# Altium PCB PCB1.PcbDoc
Units mm, origin at the board's own origin, x right, y up, seen from the top; angles counter-clockwise.
Board outline 182.88 x 101.22 mm, 2 copper layers (Top Layer, Bottom Layer); 26 components, 15 nets, 65 pads, 0 vias.
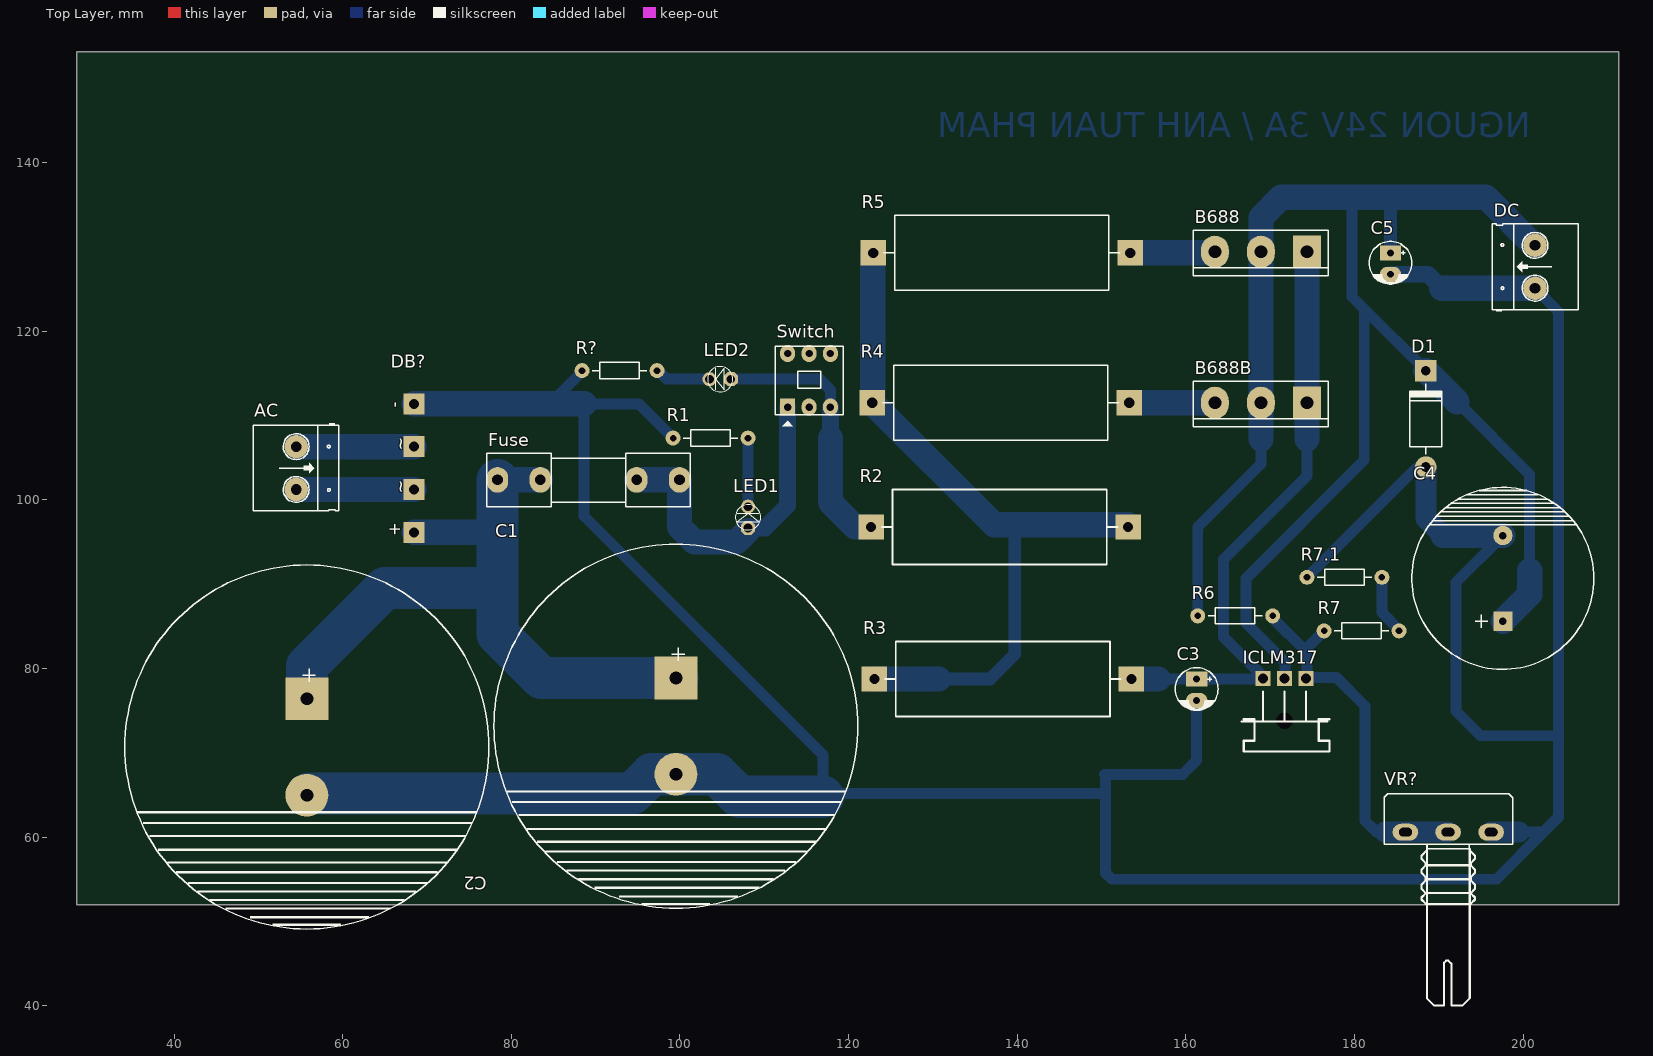
[diagram p0: Top Layer view]
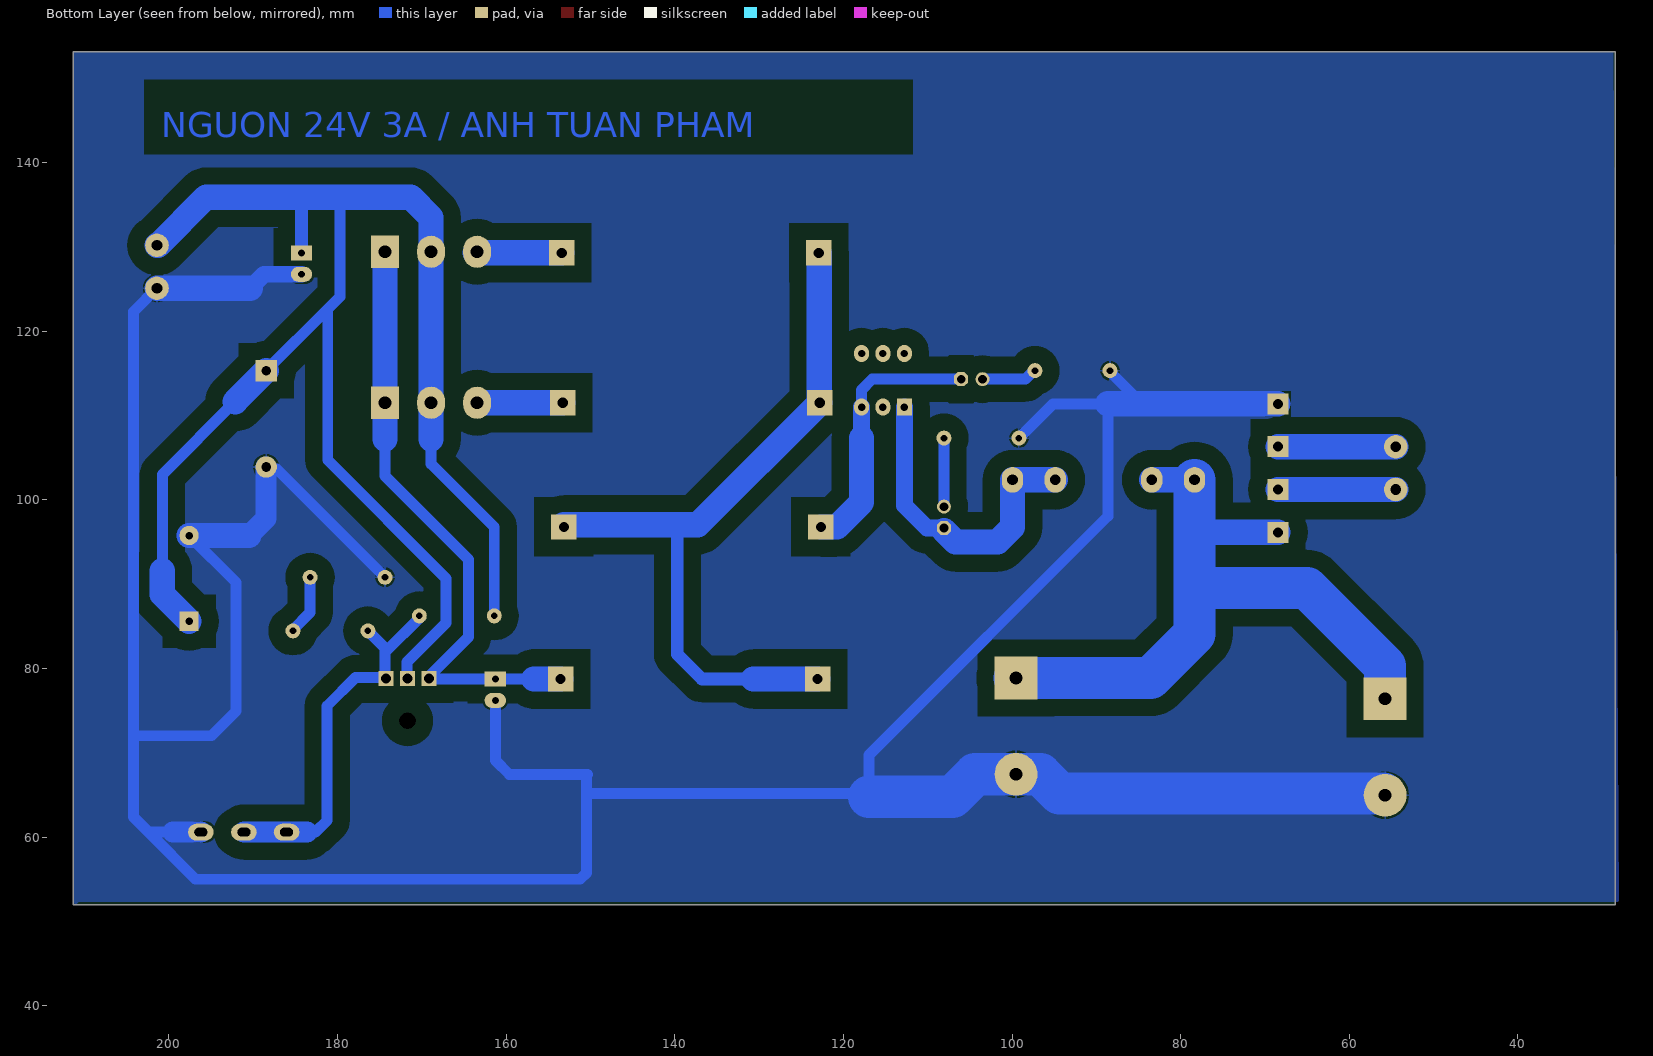
[diagram p1: Bottom Layer view, seen from below]
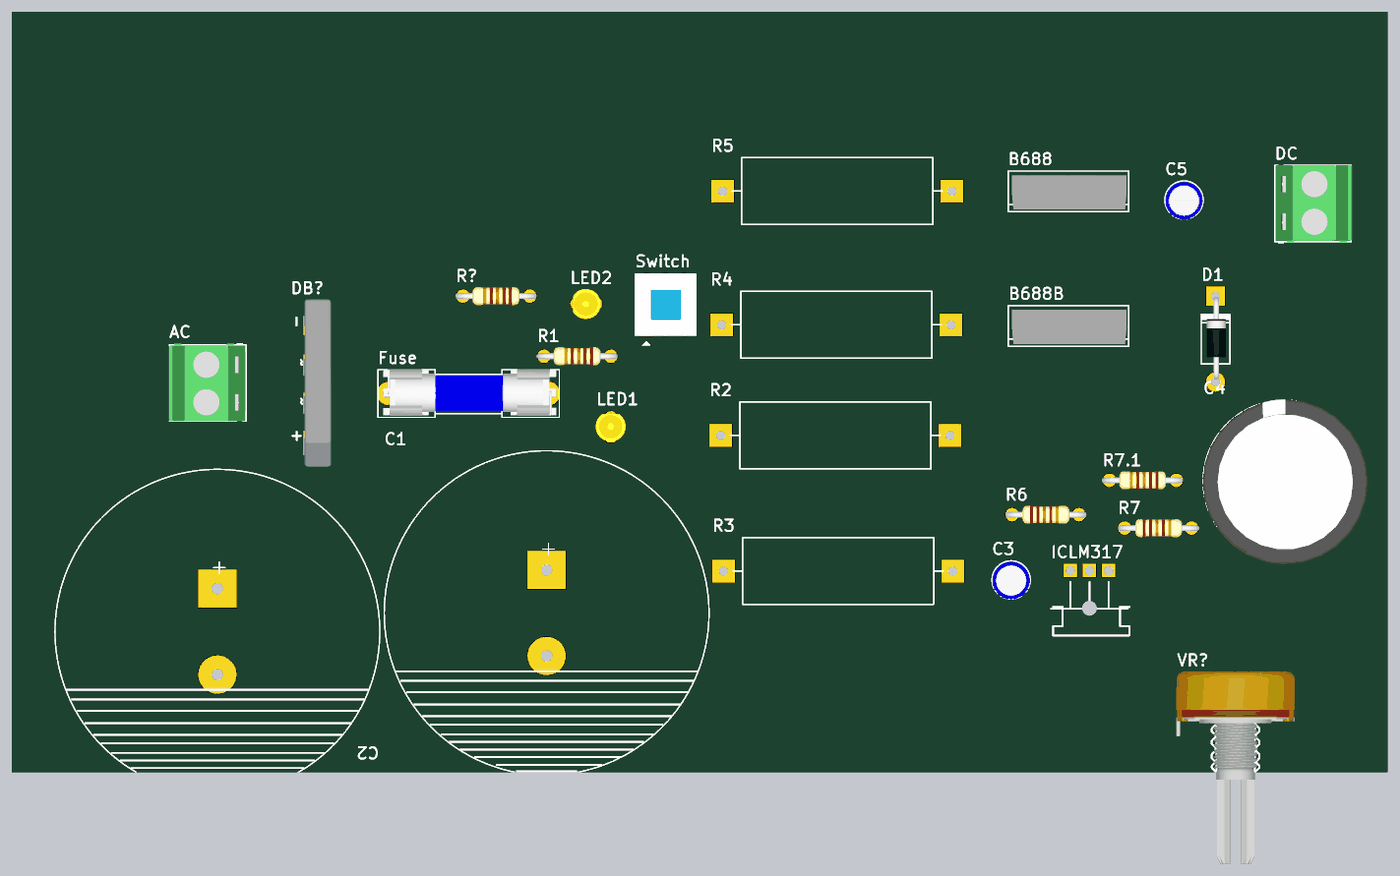
[diagram p2: 3D render of the assembled board from above, using the file's embedded part models]

## Layer stack, top to bottom
Top Solder: solder mask 0.0102, Solder Resist, Dk 3.5
Top Layer: signal copper 0.0356
Dielectric 1: dielectric 0.32, FR-4, Dk 4.8
Bottom Layer: signal copper 0.0356
Bottom Solder: solder mask 0.0102, Solder Resist, Dk 3.5

## Board outline
28.448,51.943 211.328,51.943 211.328,153.162 28.448,153.162

## Design rules (kind name [scope] priority, off if disabled: settings)
Clearance [All] p1: gap=2 ignorepadtopadclearanceinfootprint=FALSE except(0.5: Arc-Arc Arc-Track Arc-SMDPad Arc-THPad Arc-Via Arc-Text Arc-Hole Track-Track Track-SMDPad Track-THPad Track-Via Track-Text Track-Hole SMDPad-SMDPad SMDPad-THPad SMDPad-Via SMDPad-Text SMDPad-Hole THPad-THPad THPad-Via THPad-Text THPad-Hole Via-Via Via-Text Via-Hole Fill-Hole Poly-Hole Region-Hole Text-Text Text-Hole)
PolygonConnect [All] p1: connectstyle=Relief reliefconductorwidth=0.254 reliefentries=4 polygonreliefangle="90 Angle" airgapwidth=0.254
RoutingLayers [All] p1: top layer_v5=FALSE bottom layer_v5=TRUE
RoutingVias [All] p1: holewidth=0.711 width=1.27 viastyle="Through Hole" minholewidth=0.711 minwidth=1.27 maxholewidth=0.711 maxwidth=1.27
SolderMaskExpansion [All] p1: expansion=0.102 istentingtop=FALSE
Width [All] p1: maxlimit=5 minlimit=1 preferedwidth=1.3
29 further rules are at their usual default settings.

## Components (designator, comment, footprint, x,y, rotation, side; value= is the part's Value field where it differs from the comment)
AC "Header 2_1" HED2 54.483,106.299 r270 top value="Header 2"
B688 "B688" QTO-247 174.371,129.413 r180 top
B688B "B688" QTO-247 174.371,111.506 r180 top
C1 "10000uF/50V" CP4.5/19 99.528,78.867 r270 top value=220uF/450V
C2 "10000uF/50V" CP4.5/19 55.753,76.391 r270 top value=220uF/450V
C3 "0.1uF" CP1/2 161.29,78.74 r270 top value=10uF/50V
C4 "4700uF/50V" CP4/8.5 197.612,85.598 r90 top
C5 "0.1uF" CP1/2 184.277,129.286 r270 top value=10uF/50V
D1 "1N4007" D2A 188.468,115.316 r270 top
DB? "KBU1008" "DIODE BRIDGE(FLAT) BIG" 69.113,103.759 r90 top
DC "Header 2_1" HED2 201.422,125.095 r90 top value="Header 2"
Fuse "F5A" Fuse 89.154,102.362 r0 top value=Fuse
ICLM317 "LM317" TO-220 174.244,78.787 r180 top
LED1 "LED" LED-3MM-YELLOW 108.077,96.647 r90 top value="LED 3 ly Single Colour"
LED2 "LED" LED-3MM-YELLOW 106.045,114.3 r180 top value="LED 3 ly Single Colour"
R1 "Res1" R1/4W 99.187,107.315 r0 top value=2.2k
R2 "0.22" "DIEN TRO 5W" 122.682,96.774 r0 top
R3 "22" "DIEN TRO 5W" 123.063,78.74 r0 top
R4 "0.1" "DIEN TRO 5W" 122.809,111.506 r0 top
R5 "0.1" "DIEN TRO 5W" 122.936,129.286 r0 top
R6 "Res1" R1/4W 170.307,86.233 r180 top value=200
R7 "Res1" R1/4W 185.293,84.455 r180 top value=10k
R7.1 "Res1" R1/4W 174.371,90.805 r0 top value=5.1k
R? "Res1" R1/4W 88.392,115.316 r0 top value=2.2k
Switch "SW6S" SW6 112.776,110.998 r90 top value=SW6
VR? "5K" VR-S1 191.135,60.579 r0 top value="Volume 50k"

## Footprints (in the part's own frame and the unit in brackets; to place one, negate y for a bottom-side part, rotate by r counter-clockwise, add the part's x,y. Pads: shape width x height; smd on the part's side, far side on the other; paste and mask are expansions set on the pad)
CP1/2 [mil] "Tu hoa < 22uF/16>50V"
  rect 70x100 hole 32: 1(0,0)
  oval 70x100 hole 32: 2(100,0)
  silkscreen extent -53,-100 146,100, body extent -49,-99 149,99, height 287
CP4.5/19 [mil] "Tu hoa 10,000uF/63V"
  rect 200x200 hole 60: 1(0,0)
  round 200 hole 60: 2(450,0)
  silkscreen extent -625,-850 1075,850
CP4/8.5 [mil] "Tu hoa 4700uF/50V"
  rect 90x90 hole 35: 1(0,0)
  round 90 hole 35: 2(400,0)
  silkscreen extent -225,-425 625,425, body extent -236,-438 630,428, height 984
D2A [mil] "Diode 2A, W 150mil, L 450mil"
  round 100 hole 45: 1(450,0)
  rect 100x100 hole 45: 2(0,0)
  silkscreen extent 61,-75 391,75, body extent 5,-47 435,54, height 100
"DIEN TRO 5W" [mm]
  rect 3x3 hole 1.2: 1(0,0) 2(30.48,0)
  silkscreen extent 1.27,-4.44 29.21,4.44, body extent 2.54,-4.44 27.94,4.44, height 7.62
"DIODE BRIDGE(FLAT) BIG" [mm]
  rect 2.5x2.5 hole 1.2: 1(-7.62,0.66) 2(-2.54,0.66) 3(2.54,0.66) 4(7.62,0.66)
  body extent -11.15,-1.78 11.15,1.98, height 24.27
Fuse [mil] "De Fuse"
  oval 100x120 hole 50: 1(-425,0) 1(-225,0) 2(225,0) 2(425,0)
  silkscreen extent -475,-125 475,125, body extent -448,-117 459,127, height 378
HED2 [mil] "Header 2, 2 pin, hight 300mil, Pin to Pin 200, Colour Green"
  round 110 hole 50: 1(0,0) 2(200,0)
  silkscreen extent -106,-201 300,200, body extent -106,-205 300,197, height 560
LED-3MM-YELLOW [mil]
  oct 65x65 hole 40: 1(0,0)
  round 65 hole 40: 2(100,0)
  silkscreen extent -9,-59 109,59, body extent -27,-77 117,80, height 181
QTO-247 [mil] "TO-247"
  rect 130x150 hole 60: 1(0,0)
  oval 130x150 hole 60: 2(215,0) 3(430,0)
  silkscreen extent -100,-100 530,113, body extent -89,-78 511,102, height 941
R1/4W [mil] "R 1/4W, 2 Pin, 350mil"
  round 70 hole 31: 1(0,0) 2(350,0)
  silkscreen extent 48,-38 302,38, body extent -40,-47 386,47, height 111
SW6 [mil] "SW DTDP - 6Pin 260x300x300 mil"
  rect 80x70 hole 35: 1(0,0)
  oval 80x70 hole 35: 2(0,-100) 3(0,-200) 4(250,-200) 5(250,-100) 6(250,0)
  silkscreen extent -90,-260 285,58, body extent -33,-259 281,55, height 532
TO-220 [mil]
  round 70 hole 78.74 unplated: 0(100,196.85)
  rect 70x70 hole 47.24 unplated: 1(0,0) 2(100,0) 3(200,0)
  silkscreen extent -110,60 300,340
VR-S1 [mil]
  oval 120x78.74 hole 40 slot 60 at 0 deg: 1(-200,0) 2(-1,0) 3(200,0)
  silkscreen extent -299,-810 300,179, body extent -310,-818 310,188, height 839

## Part data
AC DC: "Header, 2-Pin", Manufacturer="Generic Components", Class=Connector
B688 B688B: "Transistor Power Supply"
C1 C2: library part CP9, "Cap 10000uF/63V"
C3 C5: library part CP1, "Cap P  0,1uF < 22uF , 16 - 50V", Description 1="10 => 220uF/6,3V/10V - 10uF => 100uF/16V", Description 2="0,1uF => 33uF/50V - 10uF => 22uF/63V", Description 3="0,47uF => 10uF/100V"
C4: library part CP7, "Cap 4700uF/50V"
D1: library part D1A, "Diode 1A"
DB?: library part "Diode Bridge KBU1008", "Diode Bridge"
Fuse: library part Fuse, "Fuse", Designed by=VanDungEvn
ICLM317: "Adj Voltage +1.2 -> +37V"
LED1 LED2: "LED Single colour Green and Red"
R1 R6 R7 R7.1 R?: library part Res1_4, "Resistor", Manufacturer="Generic Components", Class=Passive, Published=08/06/2000, Publisher="Altium Hobart Technology Centre", SubClass=Resistor
R2 R3 R4 R5: library part "Res 5W", "5W Res Power", Creator="Nguyen Ba Bien"
Switch: "SW-DTDP - 6 Pin"
VR?: library part VR-S, "Var Resistor"

## Nets (pads, with @x,y where several pads share a name; then routed paths per layer and width w, separated by ;. In a path a pad name is that pad's centre, name@x,y a point inside that pad or via, vN(x,y) a via of type N, cw(c..) or ccw(c..) an arc to the next point about the centre after c; other vN are vias at no path point)
GND: C1.2 C2.2 C3.2 C4.2 C5.2 D1.1 DB?.4 DC.1 R1.1 R7.1.1 R?.1 VR?.3 | length 441.6
  Bottom Layer w1.3: C2.2@55.466,65.248 C2.2 C2.2@55.943,65.151 ; 84.582,111.379 88.392,115.189 R?.1 ; R1.1 95.123,111.379 88.646,111.379 88.646,98.044 116.967,69.723 116.967,64.77 117.348,65.151 150.495,65.151 ; C1.2 C1.2@99.655,67.564 ; C3.2 161.29,69.088 159.639,67.437 150.368,67.437 150.495,67.31 150.495,65.151 ; R7.1.1 187.215,103.649 188.231,103.649 D1.1 ; C4.2 192.024,90.17 192.024,74.93 194.945,72.009 204.089,72.009 204.216,71.882 ; 199.517,60.579 202.438,60.579 ; DC.1 204.216,122.301 204.216,71.882 ; 150.495,65.151 150.495,55.753 151.257,54.991 196.85,54.991 202.438,60.579 ; 202.438,60.579 204.216,62.357 204.216,71.882
  Bottom Layer w2: C5.2 188.722,126.746 190.373,125.095
  Bottom Layer w2.5: D1.1 188.468,97.79 190.5,95.758 ; VR?.3 199.517,60.579
  Bottom Layer w3: DB?.4 84.582,111.379 88.646,111.379 ; 190.373,125.095 DC.1 ; 190.5,95.758 C4.2
  Bottom Layer w5: C2.2@55.943,65.151 94.361,65.151 96.647,67.437 C1.2 104.394,67.437 107.061,64.77 116.967,64.77
NetAC_1: AC.1 DB?.3 | length 14
  Bottom Layer w3: AC.1 DB?.3
NetAC_2: AC.2 DB?.2 | length 14
  Bottom Layer w3: AC.2 DB?.2
NetB688_1: B688.1 B688B.1 C3.1 ICLM317.3 R3.2 | length 72.4
  Bottom Layer w1.3: R3.2 R3.2@153.67,78.613 ; 156.718,78.74 C3.1 161.313,78.763 169.141,78.763 ICLM317.3 ; ICLM317.3@169.291,78.914 164.465,83.74 164.465,92.899 174.371,102.805 174.371,107.188
  Bottom Layer w3: R3.2 156.718,78.74 ; 174.371,107.188 B688B.1 B688.1
NetB688_2: B688.2 B688B.2 C4.1 C5.1 D1.2 DC.2 ICLM317.2 R6.2 | length 204.8
  Bottom Layer w1.3: R6.2 161.417,96.774 168.91,104.267 168.91,107.188 ; ICLM317.2@171.831,78.914 171.754,78.991 171.754,80.773 167.124,85.402 167.124,90.67 181.165,104.712 181.165,122.618 ; 179.705,135.89 179.705,124.079 181.165,122.618 ; 183.896,135.89 184.277,135.509 ; D1.2 181.165,122.618 ; 192.151,111.633 200.787,102.997 200.787,91.567
  Bottom Layer w1.5: C5.1 184.277,135.509
  Bottom Layer w3: 168.91,107.188 B688B.2 B688.2 168.91,133.477 171.323,135.89 179.705,135.89 183.896,135.89 195.58,135.89 201.295,130.175 DC.2 ; D1.2 192.151,111.633 ; C4.1 200.787,88.773 200.787,91.567
NetB688_3: B688.3 R5.2 | length 10.3
  Bottom Layer w3: R5.2 B688.3@163.703,129.286
NetB688B_3: B688B.3 R4.2 | length 10.2
  Bottom Layer w3: R4.2 B688B.3
NetC1_1: C1.1 C2.1 DB?.1 Fuse.1 | length 87.9
  Bottom Layer w3: DB?.1 78.359,96.139 79.121,96.139 ; Fuse.1@78.359,102.362 Fuse.1@83.439,102.362
  Bottom Layer w5: C2.1 55.753,80.264 65.024,89.535 78.232,89.535 78.359,89.662 ; Fuse.1@78.359,102.362 78.359,96.139 78.359,89.662 ; C1.1@99.695,78.867 C1.1 83.566,78.867 78.359,84.074 78.359,89.662
NetFuse_2: Fuse.2 LED1.1 Switch.1 | length 37.7
  Bottom Layer w1.3: LED1.1 LED1.1@108.14,96.71
  Bottom Layer w2: LED1.1 110.109,96.647 112.776,99.314 Switch.1
  Bottom Layer w3: Fuse.2@94.869,102.362 99.949,102.362 99.949,96.753 101.706,94.996 106.711,94.996 LED1.1@108.077,96.362
NetICLM317_1: ICLM317.1 R6.1 R7.2 VR?.1 VR?.2 | length 44.6
  Bottom Layer w1.3: R6.1@170.18,86.106 174.371,81.915 ; R7.2 174.371,82.423 174.371,81.915 ; 183.642,60.579 182.626,60.579 181.229,61.976 181.229,75.565 177.88,78.914 174.371,78.914 174.371,81.915
  Bottom Layer w2.5: 183.642,60.579 VR?.1 VR?.2
NetLED1_2: LED1.2 R1.2 | length 7.7
  Bottom Layer w1.3: LED1.2 R1.2@108.077,106.934
NetLED2_1: LED2.1 R2.1 Switch.3 | length 31.7
  Bottom Layer w1.3: LED2.1 116.586,114.3 117.856,113.03 Switch.3
  Bottom Layer w2: 117.856,107.315 Switch.3
  Bottom Layer w3: 117.856,107.315 117.856,99.695 120.777,96.774 R2.1
NetLED2_2: LED2.2 R?.2 | length 6.6
  Bottom Layer w1.3: R?.2 97.411,115.316 98.427,114.3 LED2.2
NetR2_2: R2.2 R3.1 R4.1 R5.1 | length 87.4
  Bottom Layer w1.3: R4.1 R4.1@122.872,111.569 ; R5.1@122.872,129.222 R5.1
  Bottom Layer w1.5: 130.683,78.74 136.779,78.74 139.7,81.661 139.7,97.028
  Bottom Layer w3: R4.1 137.287,97.028 139.7,97.028 R2.2@153.162,97.028 ; R4.1@122.872,111.569 R5.1@122.872,129.222 ; R3.1 130.683,78.74
NetR7.1_2: R7.1 R7.1.2 | length 7.3
  Bottom Layer w1.3: R7.1.2 183.261,86.616 185.293,84.584 R7.1 R7.1@185.202,84.546
pads on no net: ICLM317.0 Switch.2 Switch.4 Switch.5 Switch.6

## Polygon pours and split planes (outlines as drawn)
GND on Bottom Layer "GND_L02_P000" (solid, remove dead copper, pour order 0): 28.702,153.289 28.829,153.162 211.328,153.162 211.328,52.197 211.074,51.943 210.693,52.324 28.067,52.324

## Other copper
Bottom Layer:
  text "NGUON 24V 3A / ANH TUAN PHAM" at 200.914,143.002 h3

## Text inside footprints (layer, text, board x,y; h text height)
DB?: Top Overlay "-" at 66.827,110.896 h1.43 r90; Top Overlay "+" at 66.853,95.656 h1.43 r90; Top Overlay "~" at 67.564,105.842 h1.43 r90; Top Overlay "~" at 67.564,100.686 h1.43 r90